# Altium PCB Device.PcbDoc (part 2 of 4)
Units mm, origin at the board's own origin, x right, y up, seen from the top; angles counter-clockwise.
Board outline 139.06 x 99.82 mm, 4 copper layers (Top Layer, GND, PWR, Bottom Layer), stack 1.233 mm thick; 189 components, 163 nets, 636 pads, 1007 vias.
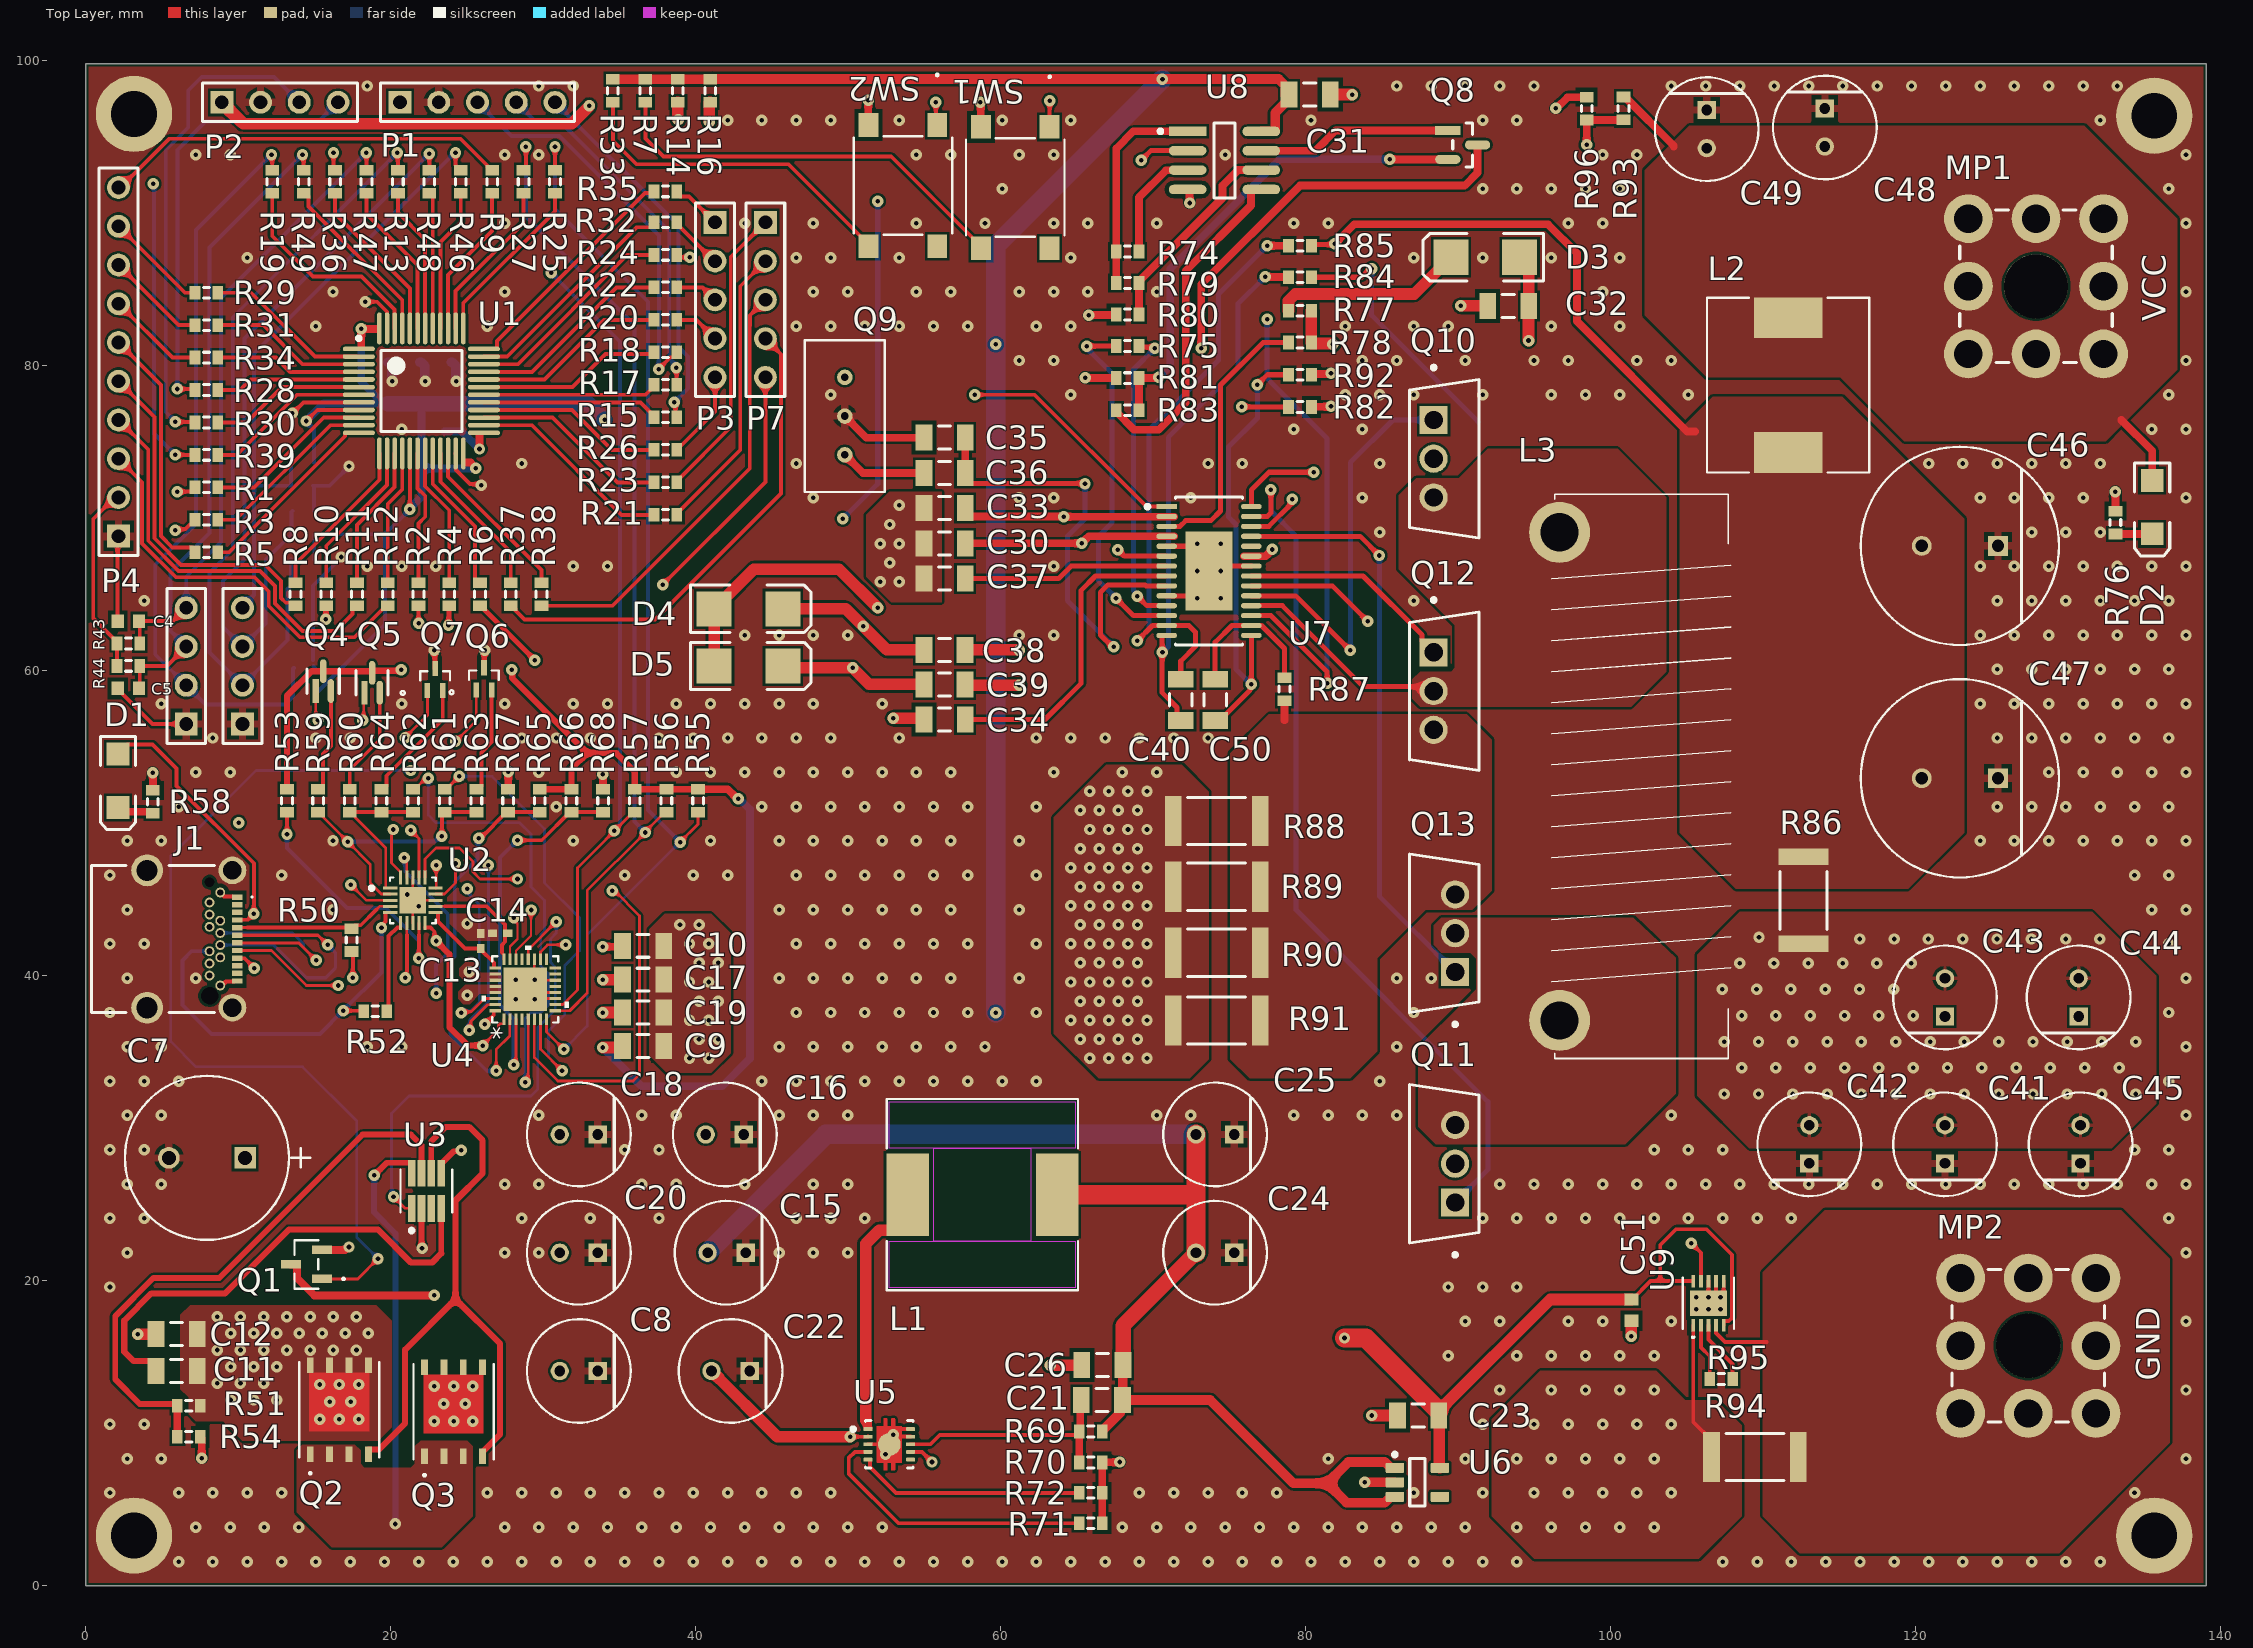
[diagram p0: Top Layer view]

## Via types
v1: diameter 0.75, hole 0.3, Top Layer to Bottom Layer, tented both sides, 1006 vias
v2: diameter 0.75, hole 0.3, Top Layer to Bottom Layer, tented top, 1 vias

## Nets (pads, with @x,y where several pads share a name; then routed paths per layer and width w, separated by ;. In a path a pad name is that pad's centre, name@x,y a point inside that pad or via, vN(x,y) a via of type N, cw(c..) or ccw(c..) an arc to the next point about the centre after c; other vN are vias at no path point) (continued)
C_SBU2: (continued)
  Top Layer w0.254: v1(23.368,49.149) R61.2@23.368,50.555 ; R61.2@23.552,50.739 R63.2@25.628,50.739
  Bottom Layer w0.254: v1(17.181,48.804) 22.868,48.804 23.213,49.149 v1(23.368,49.149)
CC1: C14.2 U2.12 U4.24 | length 7.6
  Top Layer w0.152: U4.24@27.429,41.082 U4.24@27.429,41.161
  Top Layer w0.178: U2.12@22.954,44.558 22.961,44.565 23.483,44.565 23.487,44.569 23.571,44.569 ; 27.305,41.529 27.305,41.483 27.429,41.359 U4.24@27.429,41.161
  Top Layer w0.254: 23.571,44.569 23.593,44.569 ; 23.594,44.57 26.296,44.57 27.505,43.361 27.505,42.922 C14.2@27.628,42.799 ; 27.305,41.529 27.305,42.037 27.505,42.237 27.505,42.676 C14.2@27.628,42.799 ; C14.2@27.678,42.799 C14.2@27.628,42.799
CC2: C13.2 U2.11 U4.25 | length 6
  Top Layer w0.152: U2.11@22.954,44.158 23.094,44.158 23.114,44.138 U2.11@23.114,44.119 ; U4.25@26.784,40.577 26.784,40.516 U4.25@26.863,40.516
  Top Layer w0.254: U2.11@23.114,44.119 23.114,43.561 24.884,41.791 C13.2@25.908,41.791 25.908,41.741 26.784,40.865 U4.25@26.784,40.577
COMP: C35.2 C36.2 U7.9 | length 31.6
  Top Layer w0.33: C36.2@57.677,72.983 57.677,72.683 58.062,72.298 65.497,72.298 v1(65.532,72.263) ; v1(67.408,61.586) 67.319,61.586 66.548,62.357 66.548,65.151 67.037,65.64 69.479,65.64 69.546,65.573 U7.9@70.885,65.573
  Top Layer w0.508: C36.2@57.677,72.983 C35.2@57.677,75.294
  Bottom Layer w0.33: v1(65.532,72.263) 65.532,69.977 64.389,68.834 64.389,64.605 v1(67.408,61.586)
CS: C50.2 R87.2 U7.16 | length 10
  Top Layer w0.33: C50.2@74.072,59.45 74.072,61.88 75.165,62.973 U7.16@76.435,62.973 76.437,62.971 77.11,62.971 78.613,61.468 78.613,60.821 R87.2@78.613,59.551
CSG: C50.1 R92.2 U7.15 | length 30.1
  Top Layer w0.33: C50.1@74.072,56.75 74.372,56.75 76.355,58.733 76.355,59.033 v1(76.435,59.113) U7.15@76.435,62.323 ; v1(76.838,78.77) 77.486,79.417 R92.2@78.879,79.417
  Bottom Layer w0.33: v1(76.435,59.113) 75.438,60.111 75.438,69.596 74.93,70.104 74.93,74.676 76.838,76.584 v1(76.838,78.77)
D+: J1.A6 J1.B6 U4.22 | length 35.3
  Top Layer w0.152: U4.22@28.229,41.082 28.229,41.655 29.21,42.636 v1(29.21,44.323)
  Top Layer w0.203: J1.A6@9.815,42.668 J1.A6@9.942,42.668 15.244,42.668 v1(15.875,42.037)
  PWR w0.203: v1(15.875,42.037) 19.812,42.037 21.242,43.467 22.124,43.467 23.615,44.958 28.575,44.958 v1(29.21,44.323)
  Bottom Layer w0.203: J1.B6@8.705,42.018 J1.B6@8.832,42.018 12.338,42.018 14.478,39.878 15.748,39.878 16.383,40.513 16.383,41.529 v1(15.875,42.037)
D-: J1.A7 J1.B7 U4.23 | length 30.8
  Top Layer w0.152: U4.23@27.829,41.082 27.829,41.926 28.321,42.418 28.321,43.427 28.067,43.681 v1(28.067,43.815)
  Top Layer w0.203: J1.A7@9.815,42.168 J1.A7@9.942,42.168 13.966,42.168 v1(15.113,41.021)
  PWR w0.203: v1(15.113,41.021) 19.793,41.021 21.698,42.926 22.352,42.926 23.876,44.45 27.432,44.45 v1(28.067,43.815)
  Bottom Layer w0.203: J1.B7@8.705,42.818 J1.B7@8.832,42.818 13.57,42.818 14.289,42.099 14.289,41.845 v1(15.113,41.021)
DISP_SCK: P2.3 R30.1 | length 32.2
  Top Layer w0.254: v1(5.89,76.326) 7.133,76.326 R30.1@7.172,76.288
  Bottom Layer w0.254: v1(5.89,76.326) 5.89,76.341 5.255,76.976 5.255,94.155 6.731,95.631 6.731,98.044 7.62,98.933 12.364,98.933 P2.3@14.015,97.282
DISP_SDA: P2.4 R28.1 | length 28.7
  Top Layer w0.254: v1(6.017,78.485) 7.101,78.485 R28.1@7.172,78.415
  Bottom Layer w0.254: v1(6.017,78.485) 6.017,94.155 7.874,96.012 15.285,96.012 P2.4@16.555,97.282
ENC1_A: R46.1 U1.40 | length 9.4
  Top Layer w0.254: U1.40@23.269,82.458 23.269,88.117 24.601,89.45 R46.1@24.601,91.324
ENC1_B: R48.1 U1.41 | length 9
  Top Layer w0.254: R48.1@22.541,91.324 22.546,91.324 22.769,91.101 U1.41@22.769,82.458
ENC1_BTN: C3.2 P5.2 R13.1 R42.2 | length 51.7
  Top Layer w0.254: v1(20.447,93.98) 20.48,93.947 R13.1@20.48,92.824
  Bottom Layer w0.254: R42.2@13.474,67.31 13.474,65.582 13.251,65.359 13.251,62.019 P5.2@10.287,59.055 8.128,61.214 8.128,66.421 9.652,67.945 9.652,83.185 v1(20.447,93.98)
ENC2_A: R47.1 U1.43 | length 10.3
  Top Layer w0.254: R47.1@18.42,91.324 18.42,89.958 21.769,86.609 U1.43@21.769,82.458
ENC2_B: R49.1 U1.45 | length 11.6
  Top Layer w0.254: R49.1@14.3,91.324 14.4,91.324 14.623,91.101 14.623,90.453 20.769,84.307 U1.45@20.769,82.458
ENC2_BTN: C6.2 P6.2 R19.1 R45.2 | length 49.5
  Top Layer w0.254: v1(12.192,93.853) 12.24,93.805 R19.1@12.24,92.824
  Bottom Layer w0.254: v1(12.192,93.853) 7.239,88.9 7.239,69.638 4.572,66.971 4.572,61.087 P6.2@6.604,59.055 7.874,57.785 13.078,57.785 13.613,58.32 13.613,60.148 C6.2@13.663,60.198
EPR_EN: U2.16 U4.6 | length 38.4
  Top Layer w0.178: U2.16@22.263,46.449 22.263,47.663 22.987,48.387 24.511,48.387 25.4,47.498 25.4,46.83 25.875,46.355 v1(28.321,46.355) ; U4.6@29.429,37.15 29.429,34.652 30.966,33.115 35.909,33.115 36.322,33.528 36.322,43.942 34.671,45.593 v1(34.544,45.593)
  PWR w0.178: v1(28.321,46.355) 33.782,46.355 v1(34.544,45.593)
FB: Q8.3 R75.1 U7.11 | length 50.4
  Top Layer w0.33: v1(68.961,64.897) 69.585,64.273 U7.11@70.885,64.273 ; R75.1@69.076,81.305 69.152,81.229 70.028,81.229 v1(70.104,81.153)
  Top Layer w0.508: v1(73.152,81.153) 73.152,85.344 79.629,91.821 90.424,91.821 91.272,92.669 Q8.3@91.272,94.488
  PWR w0.508: v1(70.104,81.153) v1(73.152,81.153)
  Bottom Layer w0.33: v1(68.961,64.897) 68.961,65.011 68.707,65.265 68.707,79.756 v1(70.104,81.153)
FLT_N: R53.1 U2.9 U4.18 | length 29.4
  Top Layer w0.178: 21.856,42.684 21.863,42.691 U2.9@21.863,43.467 ; U4.18@29.829,41.082 29.835,41.088 29.835,41.582 30.29,42.037 v1(31.496,42.037)
  Top Layer w0.254: v1(13.208,49.276) 13.208,49.403 R53.1@13.208,50.739 ; v1(21.844,41.148) 21.856,41.16 21.856,42.684
  PWR w0.178: v1(21.844,41.148) 30.607,41.148 v1(31.496,42.037)
  Bottom Layer w0.254: v1(13.208,49.276) 13.208,48.387 17.145,44.45 19.685,44.45 21.844,42.291 v1(21.844,41.148)